# Altium PCB STM32_RF_USB.PcbDoc
Units mil, origin at the board's own origin, x right, y up, seen from the top; angles counter-clockwise.
Board outline 1815.06 x 740.04 mil, 4 copper layers (L1, L2, L3, L4), stack 61.581 mil thick; 35 components, 33 nets, 170 pads, 74 vias.
Unrouted connection lines stored in the file: 7.
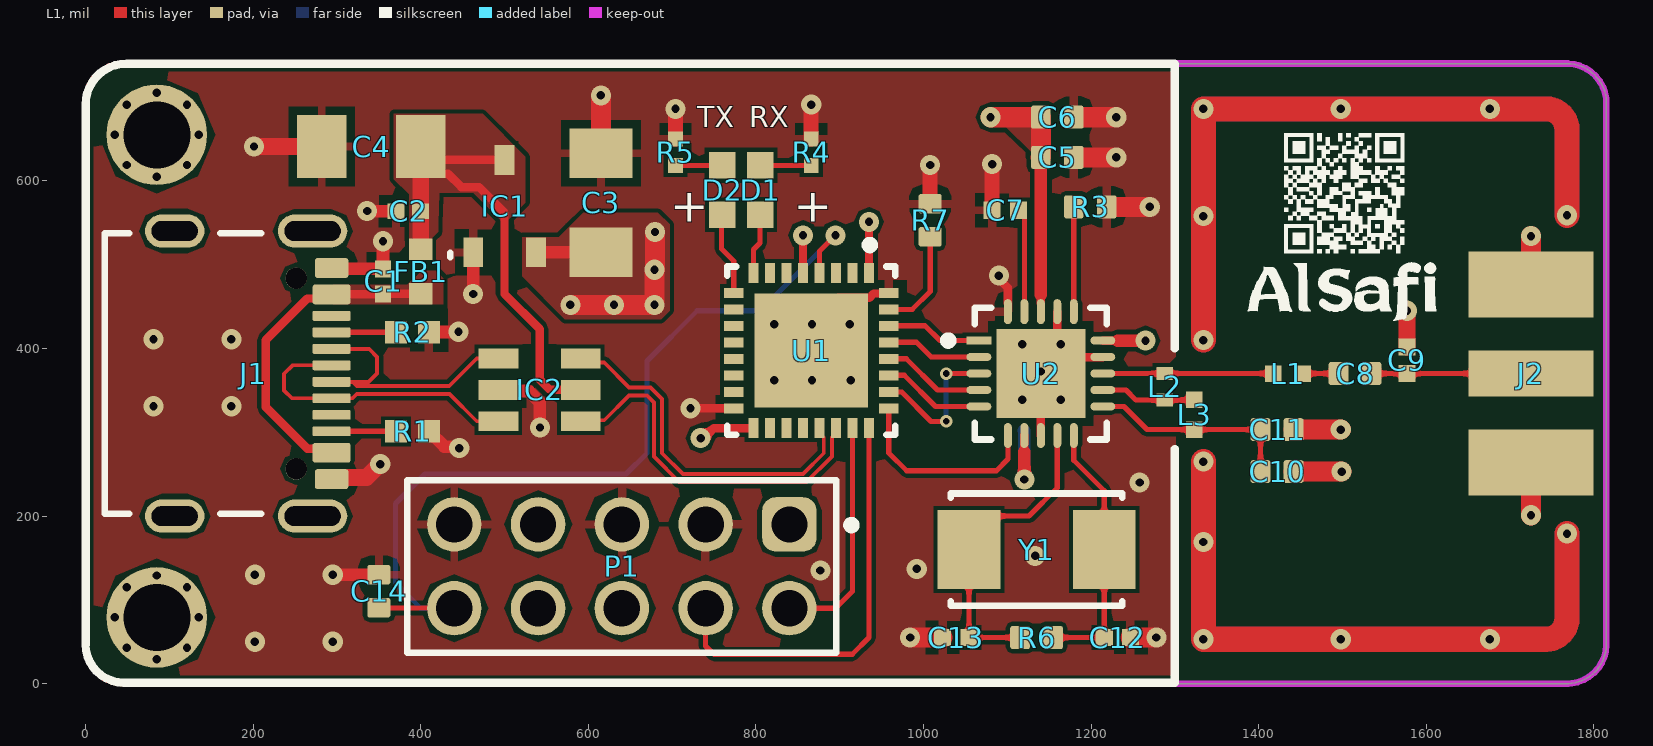
[diagram p0: L1 view]
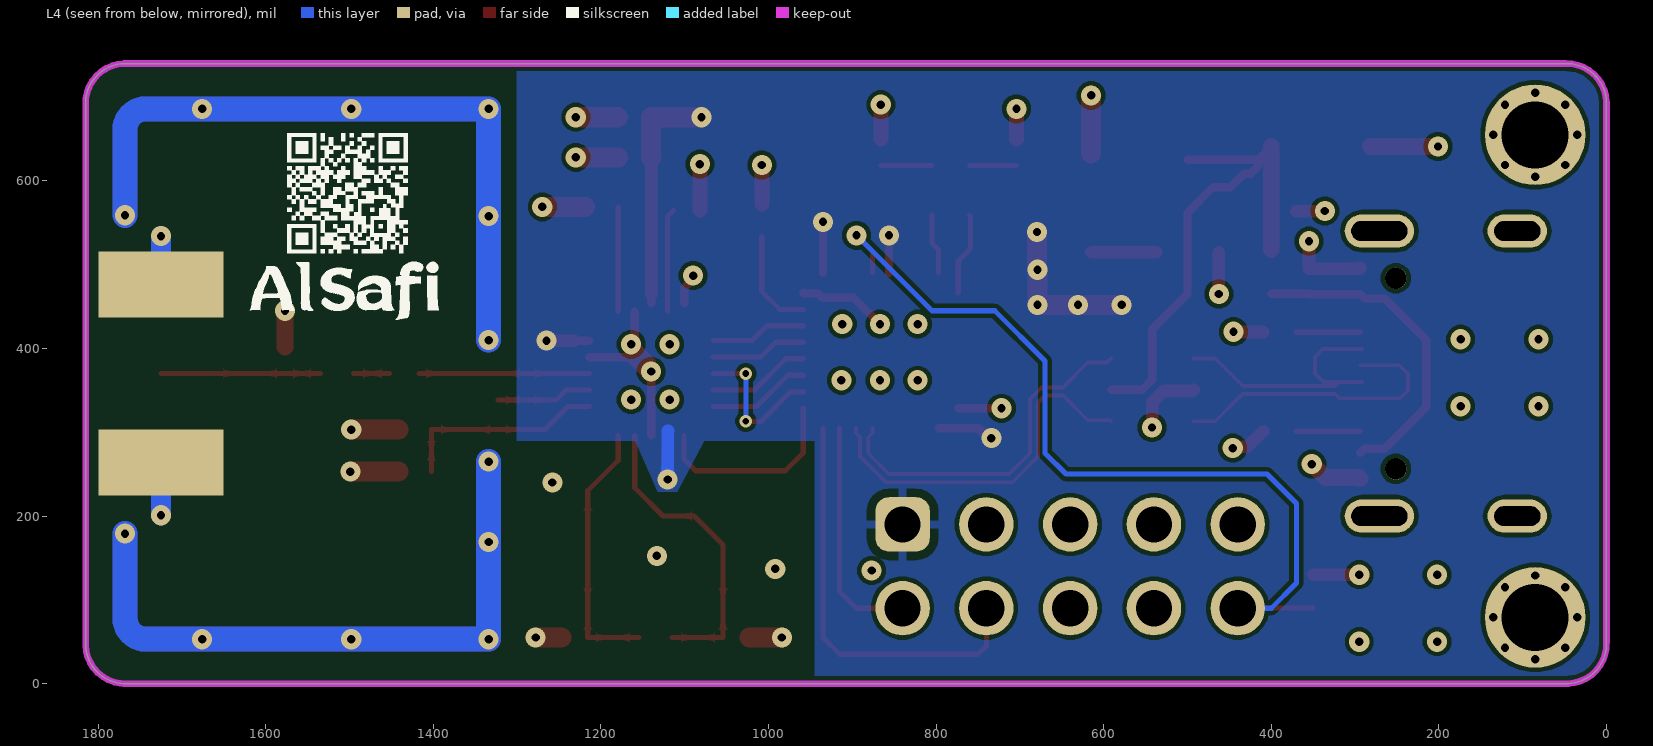
[diagram p1: L4 view, seen from below]
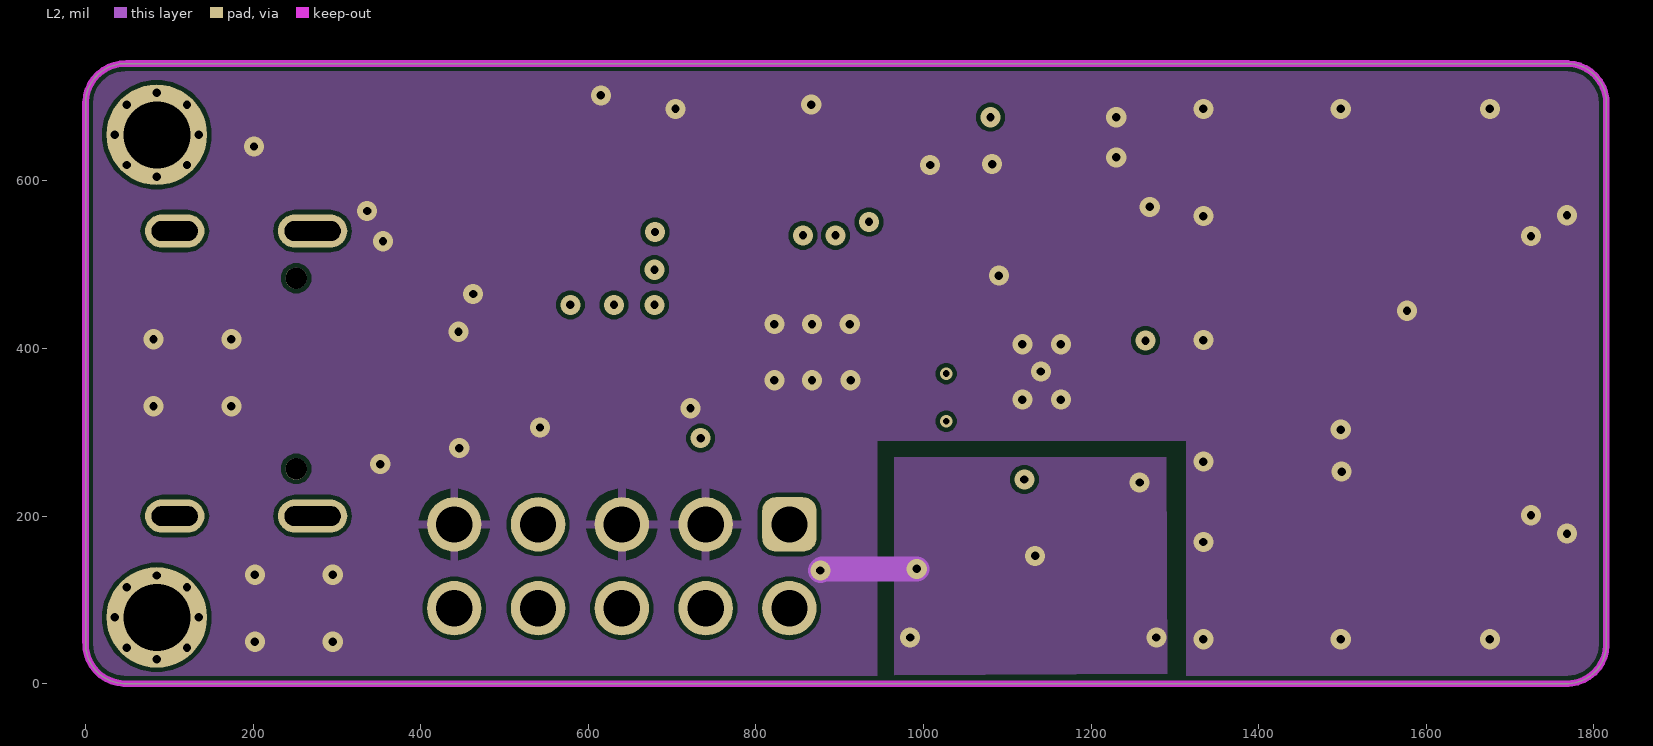
[diagram p2: L2]
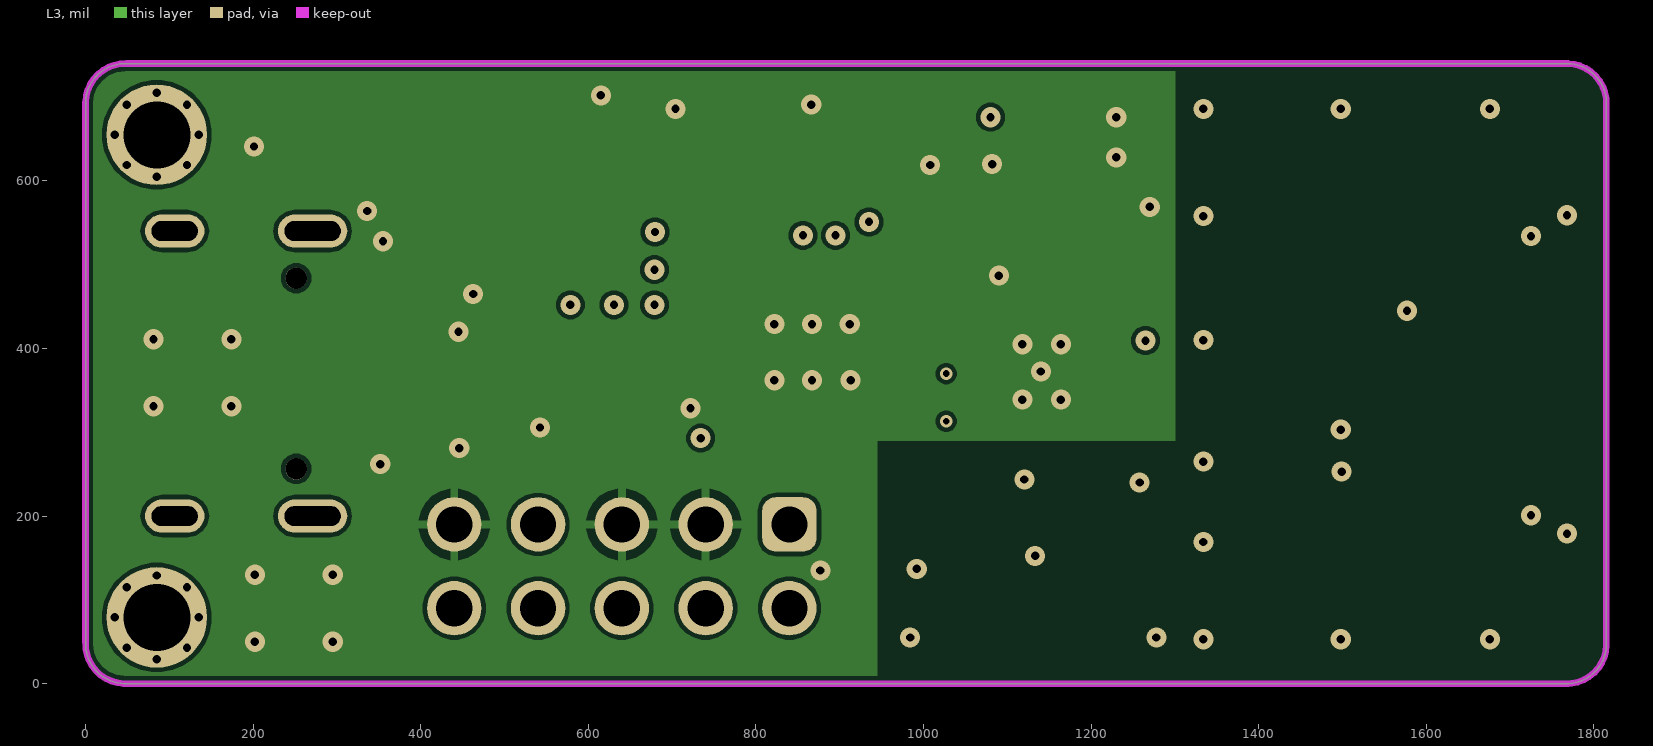
[diagram p3: L3]
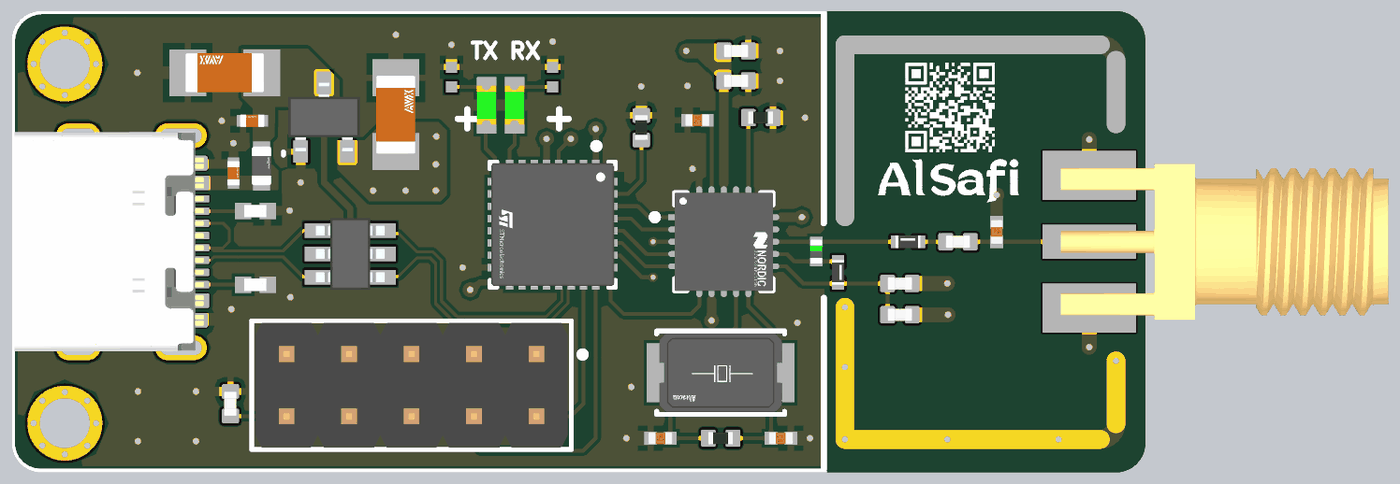
[diagram p4: 3D render of the assembled board from above, using the file's embedded part models]

## Layer stack, top to bottom
Top Solder: solder mask 1.2, Solder Resist, Dk 3.5
L1: signal copper 1.378
Dielectric 2: prepreg 3.913, PP-006, Dk 4.1
L2: signal copper 0.598
Dielectric 1: dielectric 49.803, FR-4, Dk 4.8
L3: signal copper 0.598
Dielectric 3: prepreg 3.913, PP-006, Dk 4.1
L4: signal copper 1.378
Bottom Solder: solder mask 1.2, Solder Resist, Dk 3.5

## Board outline
45.85,0 cw(c47.42,47.42) 0,48.99 0,694.15 cw(c47.42,692.58) 48.99,740 1769.18,740 cw(c1767.62,692.58) 1815.04,691.01 1815,691.01 1815,45.82 1815.06,45.82 cw(c1767.64,47.38) 1766.08,-0.04 1769.18,0

## Design rules (kind name [scope] priority, off if disabled: settings)
Clearance [All] p1: gap=5 ignorepadtopadclearanceinfootprint=FALSE
DiffPairsRouting DiffPairsRouting_DATA_OUT [InDifferentialPair('DATA_OUT')] p1: maxlimit=10 minlimit=5 mostfreqgap=10 toplayer_maxgap=5 toplayer_prefgap=5 toplayer_minwidth=4.63 toplayer_maxwidth=4.63 toplayer_prefwidth=4.63 bottomlayer_maxgap=5 bottomlayer_prefgap=5 bottomlayer_minwidth=4.63 bottomlayer_maxwidth=4.63 bottomlayer_prefwidth=4.63 impedanceprofiledriven=TRUE impedanceprofileid={FFCE39F3-9175-4516-A058-230652CB62AE} impedanceprofilevalue=90.000000 maxuncoupledlength=500
DiffPairsRouting DiffPairsRouting_DATA_IN [InDifferentialPair('DATA_IN')] p2: maxlimit=10 minlimit=5 mostfreqgap=10 toplayer_maxgap=5 toplayer_prefgap=5 toplayer_minwidth=4.63 toplayer_maxwidth=4.63 toplayer_prefwidth=4.63 bottomlayer_maxgap=5 bottomlayer_prefgap=5 bottomlayer_minwidth=4.63 bottomlayer_maxwidth=4.63 bottomlayer_prefwidth=4.63 impedanceprofiledriven=TRUE impedanceprofileid={FFCE39F3-9175-4516-A058-230652CB62AE} impedanceprofilevalue=90.000000 maxuncoupledlength=1000
HoleToHoleClearance [All] p1: gap=5 allowstackedmicrovias=TRUE
MinimumSolderMaskSliver [All] p1: minsoldermaskwidth=3.5
PolygonConnect [All] p1: thpad.connectstyle=Relief thpad.reliefconductorwidth=10 thpad.reliefentries=4 thpad.polygonreliefangle="90 Angle" thpad.airgapwidth=10 smdpad.connectstyle=Relief smdpad.reliefconductorwidth=10 smdpad.reliefentries=4 smdpad.polygonreliefangle="90 Angle" smdpad.airgapwidth=10 via.connectstyle=Direct via.reliefconductorwidth=10 via.reliefentries=4 via.polygonreliefangle="90 Angle" via.airgapwidth=10
RoutingVias Big_Scrow_Via [InNet('No Net')] p1: holewidth=28 width=28 viastyle="Through Hole" minholewidth=0 minwidth=0 maxholewidth=200 maxwidth=200
RoutingVias RoutingVias_1 [InNet('SPI_SCK')] p2: holewidth=5 width=10 viastyle="Through Hole" minholewidth=5 minwidth=6 maxholewidth=5 maxwidth=10
RoutingVias [All] p3: holewidth=10 width=24.02 viastyle="Through Hole" minholewidth=10 minwidth=24 maxholewidth=200 maxwidth=200
SolderMaskExpansion [All] p1: expansion=4 istentingtop=FALSE
Width Power_5V0 [InNet('5V0')] p1: maxlimit=100 minlimit=10 preferedwidth=24
Width Power_VBUS [InNet('VBUS')] p2: maxlimit=100 minlimit=10 preferedwidth=24
Width Power_3V3 [InNet('3V3')] p3: maxlimit=100 minlimit=10 preferedwidth=24
Width Power_GND [InNet('GND')] p4: maxlimit=100 minlimit=10 preferedwidth=24 minimp=50.000000 maximp=50.000000 favimp=50.000000
Width [All] p5: maxlimit=100 minlimit=6.17 preferedwidth=10 toplayer_maxwidth=6.17 toplayer_prefwidth=6.17 bottomlayer_maxwidth=6.17 bottomlayer_prefwidth=6.17 impedanceprofiledriven=TRUE impedanceprofileid={D1DDD18D-069C-498E-9F1E-06DCECEB124C} impedanceprofilevalue=50.000000 minimp=50.000000 maximp=50.000000 favimp=50.000000
27 further rules are at their usual default settings.

## Classes and differential pairs
component class USB_Power_3V3_Regulator: C1 C2 C3 C4 FB1 IC1 IC2 R1 R2
component class "STM32_ nRF24GHz": C5 C6 C7 C8 C9 C10 C11 C12 C13 C14 D1 D2 J2 L1 L2 L3 P1 R3 R4 R5 R6 R7 U1 U2 Y1
differential pair DATA_OUT: +DATA_OUT_P -DATA_OUT_N
differential pair DATA_IN: +DATA_IN_P -DATA_IN_N

## Components (designator, comment, footprint, x,y, rotation, side; value= is the part's Value field where it differs from the comment)
C1 "CL05A104KP5NNNC" FP-CL46-IPC_C 355,480 r90 top
C2 "CL05A104KP5NNNC" FP-CL46-IPC_C 385.1,564 r180 top
C3 "1206ZD106KAT2A" FP-1206-L_3_2_0_2-W_1_6_0-IPC_A 615,573.85 r90 top
C4 "1206ZD106KAT2A" FP-1206-L_3_2_0_2-W_1_6_0-IPC_A 340.91,641 r180 top
C5 "C0402" CAP_0402 1159.75,628 r180 top
C6 "C0402" CAP_0402 1159.75,676 r180 top
C7 "C0402C333K4RACTU" FP-C0402-BB-MFG 1097.63,565 r180 top value=33nF
C8 "C0402" CAP_0402 1515,370.05 r0 top
C9 "C0402C109C5GACTU" FP-C0402-BB-MFG 1577,385.8 r90 top value="1.0 pF"
C10 "C0402" CAP_0402 1421.97,253 r180 top
C11 "C0402" CAP_0402 1421.97,303.12 r180 top
C12 "C0402C270J5GACTU" FP-C0402-BB-MFG 1231.46,55 r0 top value="27 pF"
C13 "C0402C270J5GACTU" FP-C0402-BB-MFG 1038.54,55 r180 top value="27 pF"
C14 "C0402" CAP_0402 350,110.32 r270 top
D1 "LTST-C190GKT" FP-LTST-C190GKT-MFG 805,589 r270 top locked
D2 "LTST-C190GKT" FP-LTST-C190GKT-MFG 760,589 r270 top
FB1 "BLM18EG101TN1D" FP-BLM18-0_15-t0_5-MFG 400,491.67 r90 top
IC1 "XC6206P332MR" SOT95P280X130-3N 500,569.88 r90 top
IC2 "USBLC6-2SC6" SOT95P280X145-6N 542,350.55 r0 top
J1 "USB4105-GF-A-060" USB4105-GF-A-060 200,370.05 r270 top locked
J2 "CON-SMA-EDGE-S" CON-SMA-EDGE-S 1725,370.05 r0 top
L1 "744901082" WE-TCI_0402 1435,370.05 r0 top
L2 "LQG15HN8N2J02D" FP-LQG15HH_02-MFG 1288,354.3 r90 top
L3 "744901027" WE-TCI_0402 1323,320.84 r270 top
P1 "61301021121" 61301021121 640,140 r180 top
R1 "CRCW04025K10FKED" FP-CRCW0402-e3-IPC_A 390,301.15 r180 top
R2 "CRCW04025K10FKED" FP-CRCW0402-e3-IPC_A 390,419.26 r180 top
R3 "22K" RES_0402 1199.12,569 r180 top
R4 "CRCW040242K2FKED" RESC1005X40X25LL05T05 866,634.28 r270 top
R5 "CRCW040242K2FKED" RESC1005X40X25LL05T05 704,634.28 r270 top
R6 "1MOhm" RES_0402 1135,55 r0 top
R7 "10k" RES_0402 1008,553 r90 top
U1 "STM32L432KBU6" FP-UFQFPN32-A0B8-MFG 866.1,397.48 r270 top
U2 "NRF24L01" FP-NRF24L01-IPC_C 1140.06,370.05 r0 top
Y1 "ABM3-16.000MHZ-D2Y-T" FP-ABM3-MFG 1135,160 r180 top

## Footprints (in the part's own frame and the unit in brackets; to place one, negate y for a bottom-side part, rotate by r counter-clockwise, add the part's x,y. Pads: shape width x height; smd on the part's side, far side on the other; paste and mask are expansions set on the pad)
61301021121 [mm] "Pin Header, pitch 2.54 mm, THT, Vertical, dual row, 10p"
  rrect50% 1.65x1.65 hole 1.1: 1(-5.08,-1.27)
  round 1.65 hole 1.1: 2(-5.08,1.27) 3(-2.54,-1.27) 4(-2.54,1.27) 5(0,-1.27) 6(0,1.27) 7(2.54,-1.27) 8(2.54,1.27) 9(5.08,-1.27) 10(5.08,1.27)
  silkscreen extent -7.08,-2.62 6.5,2.62, body extent -6.35,-2.54 6.35,2.54, height 8.59
CAP_0402 [mm]
  rrect25% 0.6x0.7 smd: 1(-0.5,0) 2(0.5,0)
  body extent -0.5,-0.26 0.5,0.26, height 0.37
CON-SMA-EDGE-S [mm]
  rect 3.8x1.4 smd mask+0.07: 1(0,0)
  rect 3.8x2 smd mask+0.07: 2(0,-2.7) 2(0,2.7)
  rect 3.8x2 smd far side mask+0.07: 2(0,-2.7) 2(0,2.7)
  body extent -1.16,-3.17 12.17,3.17, height 3.64
FP-1206-L_3_2_0_2-W_1_6_0-IPC_A [mil]
  rect 59.24x75.05 smd paste+0 mask+0: 1(-59.09,0) 2(59.09,0)
  body extent -108,-57 108,57, height 10
FP-ABM3-MFG [mm]
  rect 1.9x2.4 smd paste+0 mask+0: 1(-2.05,0) 2(2.05,0)
  silkscreen extent -2.6,-1.7 2.6,1.7, body extent -3.1,-1.8 3.1,1.8, height 0.25
FP-BLM18-0_15-t0_5-MFG [mm]
  rect 0.65x0.7 smd paste+0 mask+0: 1(-0.675,0) 2(0.675,0)
  body extent -1.1,-0.58 1.1,0.58, height 0.25
FP-C0402-BB-MFG [mm]
  rect 0.52x0.52 smd paste+0 mask+0: 1(-0.4,0) 2(0.4,0)
  body extent -0.8,-0.4 0.8,0.4, height 0.25
FP-CL46-IPC_C [mil]
  rect 20.29x18.6 smd paste+0 mask+0: 1(-14.9,0) 2(14.9,0)
  body extent -29,-15 29,15, height 10
FP-CRCW0402-e3-IPC_A [mil]
  rect 26.31x26.48 smd paste+0 mask+0: 1(-19.77,0) 2(19.77,0)
  body extent -41,-21 41,21, height 10
FP-LQG15HH_02-MFG [mm]
  rect 0.4x0.5 smd paste+0 mask+0: 1(-0.4,0) 2(0.4,0)
  body extent -0.7,-0.38 0.7,0.38, height 0.25
FP-LTST-C190GKT-MFG [mm]
  rect 0.8x0.8 smd paste+0 mask+0: 1(-0.75,0) 2(0.75,0)
  body extent -1.25,-0.55 1.25,0.55, height 0.25
FP-NRF24L01-IPC_C [mm]
  rect 0.756x0.239 smd paste+0 mask+0: 1(-1.878,1)
  rrect100% 0.756x0.239 smd paste+0 mask+0: 2(-1.878,0.5) 3(-1.878,0) 4(-1.878,-0.5) 5(-1.878,-1) 11(1.878,-1) 12(1.878,-0.5) 13(1.878,0) 14(1.878,0.5) 15(1.878,1)
  rrect100% 0.239x0.756 smd paste+0 mask+0: 6(-1,-1.878) 7(-0.5,-1.878) 8(0,-1.878) 9(0.5,-1.878) 10(1,-1.878) 16(1,1.878) 17(0.5,1.878) 18(0,1.878) 19(-0.5,1.878) 20(-1,1.878)
  rect 2.7x2.7 smd paste-1000 mask+0: 21(0,0)
  silkscreen extent -2.93,-2 2,2, body extent -2.36,-2.36 2.36,2.36, height 0.25
FP-UFQFPN32-A0B8-MFG [mm]
  rect 0.6x0.3 smd paste+0 mask+0: 1(-2.35,1.75) 2(-2.35,1.25) 3(-2.35,0.75) 4(-2.35,0.25) 5(-2.35,-0.25) 6(-2.35,-0.75) 7(-2.35,-1.25) 8(-2.35,-1.75) 17(2.35,-1.75) 18(2.35,-1.25) 19(2.35,-0.75) 20(2.35,-0.25) 21(2.35,0.25) 22(2.35,0.75) 23(2.35,1.25) 24(2.35,1.75)
  rect 0.3x0.6 smd paste+0 mask+0: 9(-1.75,-2.35) 10(-1.25,-2.35) 11(-0.75,-2.35) 12(-0.25,-2.35) 13(0.25,-2.35) 14(0.75,-2.35) 15(1.25,-2.35) 16(1.75,-2.35) 25(1.75,2.35) 26(1.25,2.35) 27(0.75,2.35) 28(0.25,2.35) 29(-0.25,2.35) 30(-0.75,2.35) 31(-1.25,2.35) 32(-1.75,2.35)
  rect 3.45x3.45 smd paste+0 mask+0: 33(0,0)
  silkscreen extent -3.32,-2.55 2.55,2.55, body extent -2.75,-2.75 2.75,2.75, height 0.25
RES_0402 [mm]
  rrect25% 0.6x0.7 smd: 1(-0.5,0) 2(0.5,0)
  body extent -0.5,-0.25 0.5,0.25, height 0.3
RESC1005X40X25LL05T05 [mm] "Chip Resistor, 2-Leads, Body 1.00x0.50mm, IPC High Density"
  rect 0.45x0.45 smd: 1(-0.4,0) 2(0.4,0)
  body extent -0.53,-0.27 0.53,0.28, height 0.4
SOT95P280X130-3N [mm]
  rect 0.9x0.6 smd: 1(-1.4,0.95) 2(-1.4,-0.95) 3(1.4,0)
  silkscreen extent -1.55,1.65 -1.42,1.65, body extent -1.4,-1.45 1.4,1.45, height 1.3
SOT95P280X145-6N [mm]
  rect 1.2x0.6 smd: 1(-1.25,0.95) 2(-1.25,0) 3(-1.25,-0.95) 4(1.25,-0.95) 5(1.25,0) 6(1.25,0.95)
  body extent -1.4,-1.46 1.4,1.46, height 1.45
USB4105-GF-A-060 [mm]
  rrect25% 0.6x1.016 smd mask+0.05: A1B12(-3.2,2.378) B1A12(3.2,2.378)
  rrect25% 0.6x1.15 smd mask+0.05: A4B9(-2.4,2.378) B4A9(2.4,2.378)
  rrect25% 0.3x1.15 smd mask+0.05: A5(-1.25,2.378) A6(-0.25,2.378) A7(0.25,2.378) A8(1.25,2.378) B5(1.75,2.378) B6(0.75,2.378) B7(-0.75,2.378) B8(-1.75,2.378)
  round 0.65 hole 0.65 unplated paste+0 mask+0.05: MH(-2.89,1.303) MH(2.89,1.303)
  oval 1x2.1 hole 0.6 slot 1.7 at 90 deg: SH(-4.32,1.803) SH(4.32,1.803)
  oval 1x1.8 hole 0.6 slot 1.4 at 90 deg: SH(-4.32,-2.377) SH(4.32,-2.377)
  silkscreen extent -4.25,-4.5 4.25,0.25, body extent -4.47,-4.97 4.47,2.73, height 3.27
WE-TCI_0402 [mm] "Thinfilm Chip Inductor, 2-leads, body 1.00x0.50mm"
  rect 0.5x0.5 smd: 1(-0.45,0) 2(0.45,0)
  body extent -0.5,-0.25 0.5,0.25, height 0.32

## Part data
C1 C2: library part CMP-13271-002143-1, "Cap Ceramic 100nF 10V X5R ±10% SMD 0402 +85°C Paper T/R", Capacitance=100nF, Case Code (Imperial)=0402, Case Code (Metric)=1005, Dielectric=X5R, Max Operating Temperature=85°C, Min Operating Temperature=-55°C, Tolerance=10%, Voltage Rating=10V, Case/Package=0402, Contact Plating=Tin, Depth=0.5mm, Height=0.5mm, Length=1mm, Mount="Surface Mount", Packaging="Tape and Reel", Radiation Hardening=No, Thickness=0.022inch, Width=0.02inch
C3 C4: library part CMP-04427-021870-1, "General Purpose Ceramic Capacitor, 1206, 10uF, 10%, X5R, 15%, 10V", Capacitance=10uF, Case Code (Imperial)=1206, Case Code (Metric)=3216, Dielectric=X5R, Max Operating Temperature=85°C, Min Operating Temperature=-55°C, Package Quantity=1, Tolerance=10%, Voltage=10V, Case/Package=1206, Construction=Flat, Contact Plating=Tin, Depth=1.6mm, Height=0.07mm, Lead Free="Lead Free", Length=3.2mm, Mount="Surface Mount", Number of Pins=2, Packaging="Tape and Reel", Radiation Hardening=No, REACH SVHC="No SVHC", RoHS Compliant=Yes, Series=-, Size=1.78mm, Termination=SMD/SMT, Thickness=0.07inch, Voltage Rating=10V, Voltage Rating (DC)=10V, Width=0.063inch
C5 C6 C8 C10 C11 C14: library part CAP_0402, "Capacitor SMD 0402"
  C5: Parameter 1=10nF
  C6: Parameter 1=1nF
  C8: Parameter 1=1.5pF
  C10 C14: Parameter 1=2.2nF
  C11: Parameter 1=4.7pF
C7: library part CMP-2008-03182-2, "0402 C 33nF Ceramic Multilayer Capacitor; 16 V; +125degC; X7R Dielectric; +/-10%", Capacitance=33nF, Manufacturer=Kemet, Package=C0402-BB, Temperature="-55°C to +125°C", Temperature Characteristic=X7R, Temperature Coefficient=15%, Temperature Range High=+125°C, Temperature Range Low=-55°C, Tolerance=0.1, Voltage Rating="16 V", Automotive=No, Category=Cap, ComponentLink2Description=Datasheet, ComponentLink2URL=https://content.kemet.com/datasheets/KEM_C1002_X7R_SMD.pdf, Device Class L1="Passive Components", Device Class L2=Capacitors, Device Class L3="Ceramic Capacitors", Digikey Description="0402 C 33nF Ceramic Multilayer Capacitor; 16 V; +125degC; X7R Dielectric; +/-10%", Height=0.55mm, Ipc Land Pattern Name=CAPC10050X50, Lead Free=Yes, Manufacturer Part Number=C0402C333K4RACTU, Material=Ceramic, Mouser Description="0402 C 33nF Ceramic Multilayer Capacitor; 16 V; +125degC; X7R Dielectric; +/-10%", Octopart=https://octopart.com/c0402c333k4ractu-kemet-128815, RoHS=TRUE
C9: library part CMP-2008-03470-3, "CAP CER 1PF 50V NP0 0402", Capacitance="1.0 pF", Manufacturer=Kemet, Package=C0402-BB, Temperature="-55°C to +125°C", Temperature Characteristic=C0G, Temperature Coefficient=15%, Temperature Range High=+125°C, Temperature Range Low=-55°C, Tolerance="0.25 pF", Voltage Rating="50 V", Automotive=No, Category=Cap, ComponentLink2Description=Datasheet, ComponentLink2URL=https://content.kemet.com/datasheets/KEM_C1002_X7R_SMD.pdf, Device Class L1="Passive Components", Device Class L2=Capacitors, Device Class L3="Ceramic Capacitors", Digikey Description="CAP CER 1PF 50V NP0 0402", Height=0.55mm, Ipc Land Pattern Name=CAPC10050X50, Lead Free=Yes, Manufacturer Part Number=C0402C109C5GACTU, Material=Ceramic, Mouser Description="Multilayer Ceramic Capacitors MLCC - SMD/SMT 50volts 1.0pF C0G .25pF", Octopart=https://octopart.com/c0402c109c5gactu-kemet-9138550, RoHS=TRUE
C12 C13: library part CMP-1034-00963-6, "CAP CER 27PF 50V C0G/NP0 0402", Capacitance="27 pF", Manufacturer=Kemet, Package=C0402-BB, Temperature="-55°C to +125°C", Temperature Characteristic=C0G, Temperature Coefficient=15%, Temperature Range High=+125°C, Temperature Range Low=-55°C, Tolerance=0.05, Voltage Rating="50 V", Automotive=No, Category=Cap, ComponentLink2Description=Datasheet, ComponentLink2URL=https://content.kemet.com/datasheets/KEM_C1002_X7R_SMD.pdf, Device Class L1="Passive Components", Device Class L2=Capacitors, Device Class L3="Ceramic Capacitors", Digikey Description="CAP CER 27PF 50V C0G/NP0 0402", Height=0.55mm, Ipc Land Pattern Name=CAPC10050X50, Lead Free=Yes, Manufacturer Part Number=C0402C270J5GACTU, Material=Ceramic, Mouser Description="Multilayer Ceramic Capacitor, C Series, 27 pF, - 5%, C0G / NP0, 50 V, 0402 [1005 Metric]", Octopart=https://octopart.com/c0402c270j5gactu-kemet-149444, RoHS=TRUE
D1 D2: library part CMP-22017-000005-2, "LED GREEN CLEAR CHIP SMD", Case Code (Imperial)=0603, Case Code (Metric)=1608, Color=Green, Forward Current=30mA, Forward Voltage=2.1V, Lens Color=Colorless, Max Operating Temperature=85°C, Min Operating Temperature=-55°C, Package Quantity=1, Power Dissipation=100mW, Reverse Voltage=5V, Test Current=10mA, Voltage=2V, Case/Package=0603, Depth=0.8mm, Dominant Wavelength=569nm, Height=0.8mm, Illumination Color=Green, Lead Free="Lead Free", Length=1.6mm, Lens Style=Clear, Lens Transparency=Clear, Luminous Intensity=6mcd, Mount="Surface Mount", Number of Elements=1, Number of LEDs=1, Number of Pins=2, Packaging="Tape and Reel", Power Rating=100mW, Radiation Hardening=No, Viewing Angle=130°, Wavelength=565nm, Width=0.8mm
FB1: library part CMP-0686-00530-3, "Chip Ferrite Bead, 0603, 100Ω @ 100MHz, 25%, 0.045Ω, 2A", Case Code (Imperial)=0603, Case Code (Metric)=1608, Current Rating=2A, DC Resistance (DCR)=45mR, Max Operating Temperature=125°C, Min Operating Temperature=-55°C, Package Quantity=1, Test Frequency=100MHz, Tolerance=25%, Case/Package=0603, Contact Plating=Tin, Core Material=Ferrite, Depth=0.8mm, Height=0.8mm, Impedance=100R, Lead Free="Lead Free", Length=1.6mm, Material=Ferrite, Max Current Rating=2A, Max DC Current=2A, Number Of Circuits=1, Number of Lines=1, Number of Pins=2, Packaging="Tape and Reel", REACH SVHC="No SVHC", Termination=SMD/SMT, Width=0.8mm
IC1: "Integrated Circuit", Manufacturer_Name=Torex, Mouser Part Number=N/A, Datasheet Link=http://www.torexsemi.com/products/voltage_regulators/data/XC6206.pdf, Height=1.3mm, Manufacturer_Part_Number=XC6206P332MR, Mouser Price/Stock=https://www.mouser.co.uk/ProductDetail/Torex-Semiconductor/XC6206P332MR?qs=TiOZkKH1s2Qxu69VLzzkSQ%3D%3D
IC2: "Integrated Circuit", Manufacturer_Name=STMicroelectronics, Mouser Part Number=511-USBLC6-2SC6, Arrow Part Number=USBLC6-2SC6, Arrow Price/Stock=https://www.arrow.com/en/products/usblc6-2sc6/stmicroelectronics?utm_currency=USD&region=europe, Datasheet Link=http://www.st.com/st-web-ui/static/active/en/resource/technical/document/datasheet/CD00050750.pdf, Height=1.45mm, Manufacturer_Part_Number=USBLC6-2SC6, Mouser Price/Stock=https://www.mouser.co.uk/ProductDetail/STMicroelectronics/USBLC6-2SC6?qs=po45yt2pPpu%2FhNIlwQdTlg%3D%3D
J1: "USB Connector Type C SMT 12 Pin", Manufacturer=GCT, Distributor Link=https://eu.mouser.com/ProductDetail/GCT/USB4105-GF-A-060?qs=QNEnbhJQKvY2mocwNJzgfA%3D%3D, Manufacturer Part Number=USB4105-GF-A-060
J2: "RF Connector SMA Female 50 Ohms 18 GHz PCB Edge Mount", Manufacturer="RF Solutions", Manufacturer Part Number=CON-SMA-EDGE-S
L1: library part CMP-03913-14415882-1, "744901082 Fixed Ind 8.2NH 220MA 1.1 Ohm SMD", Case Code (Imperial)=0402, Case Code (Metric)=1005, Current Rating=220mA, DC Resistance (DCR)=540mΩ, Inductance=8.2nH, Max Operating Temperature=125°C, Min Operating Temperature=-40°C, Self Resonant Frequency=5.5GHz, Test Frequency=500MHz, Tolerance=2%, Case/Package=0402, Composition="Thin Film", Height=320µm, Height - Seated (Max)=406.4µm, Length=1mm, Max DC Current=220mA, Mount="Surface Mount", NexarPartId=14415882, Number of Pins=2, Packaging=Digi-Reel®, Q Factor=13, REACH SVHC=Unknown, RoHS=Compliant, Shielding=Unshielded, Termination=SMD/SMT, Weight=652.039032µg, Width=500µm
L2: library part CMP-06042-008586-1, "Multilayer type RF Inductor 8.2nH ±5% 0.25Ω 500mA 0402", Case Code (Imperial)=0402, Case Code (Metric)=1005, Current Rating=300mA, DC Resistance (DCR)=330mR, Inductance=8.2nH, Inductance Tolerance=5%, Max Operating Temperature=125°C, Min Operating Temperature=-55°C, Package Quantity=1, Self Resonant Frequency=3.6GHz, Test Frequency=100MHz, Case/Package=0402, Core Material=Air, DC Current=300mA, Depth=0.55mm, Height=0.02inch, Height - Seated (Max)=0.022inch, Lead Free="Lead Free", Length=1mm, Max DC Current=300mA, Military Standard=Not, Mount="Surface Mount", Packaging="Tape and Reel", Q Factor=8, Radiation Hardening=No, REACH SVHC="No SVHC", Shielding=Unshielded, Termination=SMD/SMT, Tolerance=5%, Width=0.5mm
L3: library part CMP-03913-14415876-1, "744901027 Fixed Ind 2.7NH 440MA 300MOHM Sm", Case Code (Imperial)=0402, Case Code (Metric)=1005, Current Rating=440mA, DC Resistance (DCR)=270mΩ, Inductance=2.7nH, Max Operating Temperature=125°C, Min Operating Temperature=-40°C, Self Resonant Frequency=8GHz, Test Frequency=500MHz, Case/Package=0402, Composition="Thin Film", Core Material=Alumina, Height=320µm, Height - Seated (Max)=406.4µm, Length=1mm, Max DC Current=440mA, Mount="Surface Mount", NexarPartId=14415876, Number of Pins=2, Packaging="Tape & Reel (TR)", Q Factor=13, REACH SVHC=Unknown, RoHS=Compliant, Shielding=Unshielded, Termination=SMD/SMT, Weight=652.039032µg, Width=500µm
P1: library part CMP-1502-01084-3, Color=Black, Contact Resistance=20mΩ, Current Rating=3A, Flammability Rating="UL94 V-0", Insulation Resistance=1GΩ, Max Operating Temperature=105°C, Min Operating Temperature=-40°C, Operating Supply Voltage=250V, Connector Type="Male Pin", Contact Gender=Male, Contact Material=Copper, Contact Mating Length=5.9944mm, Contact Plating=Gold, Gender=Male, Height=2.54mm, Housing Material=PBT, Insulation=Insulated, Lead Pitch=2.54mm, Length=12.7mm, Mount="Through Hole", NexarPartId=18818163, Number of Contacts=10, Number of Pins=10, Number of Positions=10, Number of Rows=2, Orientation=Vertical, Packaging=Bulk, Pitch=2.54mm, REACH SVHC=Unknown, RoHS=Compliant, Row Spacing=2.54mm, Termination="Through Hole", Voltage Rating=250V, Width=12.7mm
R1 R2: library part CMP-1011-00590-4, "RES Thick Film, 5.1kΩ, 1%, 0.063W, 100ppm/°C, 0402", Case Code (Imperial)=0402, Case Code (Metric)=1005, Max Operating Temperature=155°C, Max Power Dissipation=63mW, Min Operating Temperature=-55°C, Package Quantity=10, Resistance=5.1kR, Temperature Coefficient=100ppm/°C, Tolerance=1%, Voltage Rating=50V, Case/Package=0402, Composition="Thick Film", Contact Plating=Tin, Depth=0.5mm, Features="Automotive AEC-Q200", Height=0.35mm, Lead Free="Lead Free", Length=1mm, Military Standard=Not, Number of Terminations=2, Packaging="Tape and Reel", Power Rating=63mW, Radiation Hardening=No, Termination=SMD/SMT, Voltage Rating (DC)=50V, Weight=2.3E-05oz, Width=0.02inch
R3 R6 R7: library part RES_0402, "Resistor SMD 0402"
  R7: Resistance=10k
R4 R5: library part CMP-2002-08626-1, Manufacturer="Vishay Dale", Parameter 1=2K2Ohm, Part Number=CRCW040242K2FKED
U1: library part CMP-12105-000014-1, "IC MCU 32BIT 128KB FLASH 32QFPN", Ambient Temperature Range High=+85°C, Ambient Temperature Range Low=-40°C, Frequency=80MHz, Manufacturer=STMicroelectronics, Max Junction Temp=+105°C, Max Supply Voltage=3.6V, Min Supply Voltage=1.62V, Package=UFQFPN32-A0B8, Temperature="-40°C to +85°C", Automotive=No, Category=IC, ComponentLink2Description=Datasheet, ComponentLink2URL=https://www.st.com/resource/en/datasheet/stm32l432kb.pdf, Core Architecture="ARM Cortex-M4", Data Bus Width=32bits, Device Class L1="Integrated Circuits (ICs)", Device Class L2="Embedded Processors and Controllers", Device Class L3=Microcontrollers, Digikey Description="IC MCU 32BIT 128KB FLASH 32QFPN", Height=0.6mm, Interface=I2C,SPI,UART,USART,USB,IrDA, Ipc Land Pattern Name=QFN50P500X500X55-32, Lead Free=Yes, Manufacturer Part Number=STM32L432KBU6, Memory Size=128KBytes, Memory Type=FLASH, Number Of A/D Converters=1, Number Of Adc Channels=10, Number Of Cores=1, Number Of I2C Channels=2, Number Of I/Os=26, Number Of Spi Channels=2, Number Of Timers/Counters=8, Number Of Uart Channels=1, Octopart=https://octopart.com/stm32l432kbu6-stmicroelectronics-74568735, Ram Size=64KBytes, RoHS=TRUE, Temperature Range High=+85°C, Temperature Range Low=-40°C
U2: library part CMP-228436-000003-1, "IC RF TXRX ISM>1GHZ 20VFQFN"
Y1: library part CMP-27762-004490-1, "Crystal 16MHz ±20ppm 18pF SMD-2 5mm x 3.2mm", Case/Package=SMD/SMT, ESR (Equivalent Series Resistance)=40R, Frequency=16MHz, Frequency Stability=30ppm, Frequency Tolerance=20ppm, Load Capacitance=18pF, Max Operating Temperature=85°C, Min Operating Temperature=-40°C, Operating Frequency="16 MHz", Package Quantity=1000, Resistor Type=Ceramic, Height=0.051inch, Lead Free="Lead Free", Length=0.197inch, Mount="Surface Mount", Number of Pins=2, Packaging="Tape and Reel", RoHS Compliant=Yes, Series=ABM3, Series Resistance=40R, Termination=SMD/SMT, Tolerance=20ppm, Width=0.126inch

## Free pads (board coordinates)
  round 120 hole 80: 2(85,79) 2(85,655)
  round 0 hole 10: 3(135,79) 3(135,655) 4(35,79) 4(35,655) 5(85,129) 5(85,705) 6(85,29) 6(85,605) 7(49,115) 7(49,691) 8(121,43) 8(121,619) 9(49,43) 9(49,619) 10(121,115) 10(121,691)

## Via types
v1: diameter 24, hole 10, L1 to L4, tented both sides, 51 vias
v2: diameter 24, hole 10, L1 to L4, 12 vias
v3: diameter 24, hole 10, L1 to L4, tented top, 5 vias
v4: diameter 24.02, hole 10, L1 to L4, tented both sides, 4 vias
v5: diameter 15, hole 8, L1 to L4, tented both sides, 2 vias

## Nets (pads, with @x,y where several pads share a name; then routed paths per layer and width w, separated by ;. In a path a pad name is that pad's centre, name@x,y a point inside that pad or via, vN(x,y) a via of type N, cw(c..) or ccw(c..) an arc to the next point about the centre after c; other vN are vias at no path point)
3V3: C3.1 C5.2 C6.2 IC1.2 P1.1 U1.1 U1.5 U1.17 U2.7 U2.15 U2.18 | length 884
  L1 w10: v1(734,293) 737.79,293 749.75,304.96 U1.17 ; U1.5 v1(856.26,535) ; U1.1 v1(935,551) ; 1120.41,276.64 U2.7 ; 1140.06,463.94 1140.12,463.88 U2.18@1140.12,453.87 ; U2.15 1232,409.42
  L1 w15: IC1.2 C3.1 ; v1(1120.41,243.64) 1120.41,276.64 ; 1140.06,463.94 C5.2 ; 1232,409.42 v1(1265,409.42)
  L1 w24: v1(578.6,452) v1(630.6,452) v1(679,452) v1(679,494) 679.6,494 v1(679.6,539) ; v1(1080,676) C6.2 1140.06,664.5 C5.2 C5.2@1140,627.94
  L4 w15: 1120,302 1120.41,301.59 v1(1120.41,243.64)
5V0: C2.1 C4.1 FB1.2 IC1.3 IC2.5 | length 630.9
  L1 w10: C4.1@400,625 C4.1@416,625 ; C4.1 C4.1@416,625 ; IC1.3 C4.1@416,625 ; IC2.5 554.45,350.55 542,363 542,423 500,465 500,562 469.52,592.48 448.52,592.48 432.52,608.48 424.62,608.48 416,617.1 C4.1@416,625
  L1 w20: FB1.2 400,553 400,625 C4.1
CC1: J1.A5 R2.2 | length 76.6
  L1 w6.17: J1.A5 R2.2
CC2: J1.B5 R1.2 | length 76.6
  L1 w6.17: J1.B5 R1.2
DATA_IN_N: IC2.1 J1.A7 J1.B7 | length 355.9
  L1 w4.63: J1.A7@291.4,360.11 337.89,360.11 348,370.22 348,390 338.52,399.48 J1.B7@291.4,399.48 ; J1.A7 318.55,360.21 323.58,355.18 434.08,355.18 466.85,387.95 IC2.1
DATA_IN_P: IC2.3 J1.A6 J1.B6 | length 355.8
  L1 w4.63: J1.A6 247.11,379.89 237,369.78 237,350 246.48,340.52 J1.B6 318.55,340.52 323.58,345.55 434.45,345.55 466.85,313.15 IC2.3
DATA_OUT_N: IC2.6 U1.21 | length 427.2
  L1 w4.63: IC2.6 595.89,383.27 619.07,383.27 648.71,353.63 673.99,353.63 688,339.62 688,275 713,250 856,250 880.97,274.97 880.97,294.03 875.94,299.06 U1.21
DATA_OUT_P: IC2.4 U1.22 | length 441.7
  L1 w4.63: IC2.4 592.42,314.35 619.07,314.35 648.71,344 670,344 678.37,335.63 678.37,271.01 709.01,240.37 859.99,240.37 890.6,270.99 890.6,294.03 895.63,299.06 U1.22
DVDD: C7.1 U2.19 | length 123.9
  L1 w6.17: C7.1 1120.38,558 U2.19
GND: C1.2 C2.2 C3.2 C4.2 C5.1 C6.1 C7.2 C9.2 C10.1 C11.1 C12.2 C13.2 C14.1 IC1.1 IC2.2 J1.A1B12 J1.B1A12 J2.2 P1.3 P1.5 P1.9 R1.1 R2.1 R3.1 R4.1 R5.1 R7.2 U1.16 U1.32 U1.33 U2.8 U2.14 U2.17 U2.20 U2.21 | length 5138.7
  L1 w10: v1(722,328.58) U1.16 ; v1(867,429) 898.39,460.39 935.39,460.39 940.54,465.54 957.78,465.54 U1.32 ; v1(1090,487) 1090,483.21 1100.4,472.81 U2.20@1100.4,453.87 ; U2.8 U2.21 v1(1140.06,372.56) 1140.06,385.06 U2.21@1159.75,404.75 ; U2.21@1159.75,389.73 U2.14 ; U2.17 U2.21@1159.75,404.75 ; U2.21@1160,405 U2.21@1159.75,404.75
  L1 w15: J1.B1A12 J1.B1A12@294.07,244.53 ; J1.A1B12 294.73,494.9 C1.2 v1(355,528) ; v1(295,130) C14.1 ; v1(336,564) C2.2 ; R1.1 409.77,301.07 428.11,282.72 444.28,282.72 v1(446,281) ; R2.1 410.14,419.63 444.63,419.63 v4(445,420) ; v1(462.6,465) IC1.1 ; IC2.2 494.08,349.25 528.75,349.25 542.28,335.73 v4(542.28,305.72)
  L1 w18: R5.1 v1(704,686) ; R4.1 v1(866,691) ; R7.2 v1(1008,619) ; C7.2 v1(1081.88,620)
  L1 w20: v1(201,641) C4.2 ; J1.B1A12@294.07,244.53 295.41,245.88 335.48,245.88 v4(351.62,262.01) ; U2.21 U2.21@1159.75,389.73 ; C9.2 v3(1577,445)
  L1 w24: C3.2 v1(615,702) ; v1(984,55) C13.2 ; C5.1 v1(1230,628) ; C6.1 v1(1230,676) ; R3.1 v1(1270,569) ; C12.2 v1(1278,55) ; C10.1 v3(1499,253) ; C11.1 v3(1498,303.12) ; v3(1725,201) J2.2@1725,263.75 ; J2.2@1725,476.35 v3(1725,534)
  L1 w30: v2(1334,265) v2(1334,169) v2(1334,53) v2(1498,53) v2(1676,53) 1743,53 ccw(c1743,78) 1768,78 v2(1768,179) ; v2(1334,410) v2(1334,558) v2(1334,686) v2(1498,686) v2(1676,686) 1743,686 cw(c1743,661) 1768,661 v2(1768,559)
  L2 w30: v1(877,135) 879,137 v1(992,137)
  L4 w24: v3(1725,201) J2.2@1725,263.75 ; J2.2@1725,476.35 v3(1725,534)
  L4 w30: v2@1334.01,265.1 1334.01,53.1 1743.01,53.1 ccw(c1743.01,78.1) 1768.01,78.1 v2@1768.01,179.1 ; v2@1334.1,410 1334.1,686 v2(1498,686) v2(1676,686) 1743.1,686 cw(c1743.1,661) 1768.1,661 v2@1768.1,559
  other v1: 202,50 295,50 202,130 1133.17,152.43 1258,240 81,331 174,331 1118,339 1164,339 822,362 867,362 913,362 1118,405 1164,405 81,411 174,411 822,429 912,429
IREF: R3.2 U2.16 | length 125
  L1 w6.17: U2.16 R3.2
LED1: D1.2 U1.8 | length 72.7
  L1 w6.17: U1.8 797.2,518.2 805,526 D1.2
LED2: D2.2 U1.9 | length 99.5
  L1 w6.17: D2.2 759,558.47 759,519 773.58,504.42 U1.9
NetC8_1: C8.1 L1.2 | length 42.6
  L1 w6.17: L1.2 C8.1
NetD1_1: D1.1 R4.2 | length 61
  L1 w6.17: D1.1 R4.2
NetD2_1: D2.1 R5.2 | length 56
  L1 w6.17: R5.2 D2.1
NRF_ANT1: L2.1 L3.1 U2.12 | length 113.9
  L1 w6.17: U2.12 1241.64,350.36 1253.45,338.55 L2.1 L3.1
NRF_ANT2: L1.1 L2.2 U2.13 | length 273.3
  L1 w6.17: U2.13 L2.2 ; U2.13@1218,370.05 L1.1
NRF_CE: U1.30 U2.1 | length 114.8
  L1 w6.17: U1.30 1001.99,427.01 1019.58,409.42 U2.1
NRF_IRQ: U1.25 U2.6 | length 238.5
  L1 w6.17: U1.25 958.62,275.38 980,254 1087,254 1101,268 1101,295.8 U2.6
NRF_VDD_PA: C10.2 C11.2 L3.2 U2.11 | length 249.8
  L1 w6.17: U2.11 1239.32,330.68 1266.88,303.12 L3.2 C11.2 C10.2
NRF_XC1: C12.1 R6.2 U2.10 Y1.1 | length 317.2
  L1 w6.17: R6.2 C12.1 Y1.1 1215.71,230.29 1179.43,266.57 U2.10
NRF_XC2: C13.1 R6.1 U2.9 Y1.2 | length 367.7
  L1 w6.17: R6.1 C13.1 Y1.2 1054.29,165.68 1088.61,200 1126,200 1159.75,233.75 U2.9
NRST: C14.2 P1.10 U1.4 | length 1042.6
  L1 w6.17: C14.2 350.31,90.32 439.68,90.32 P1.10 ; U1.4 875.94,515.94 v4(895,535)
  L4 w6.17: P1.10 400,90 370,120 370,215 405,250 645,250 670,275 670,385 730,445 805,445 v4(895,535)
PH3: R7.1 U1.31 | length 123.5
  L1 w6.17: U1.31 986.69,446.69 1008,468 R7.1
SMA: C8.2 C9.1 J2.1 | length 190.3
  L1 w6.17: C8.2 C9.1 J2.1
SPI_CS: U1.29 U2.2 | length 114.8
  L1 w6.17: U1.29 991.68,407.32 1009.27,389.73 U2.2
SPI_MIOS: U1.27 U2.5 | length 123
  L1 w6.17: U1.27 958.67,368 977,368 1014.32,330.68 U2.5
SPI_MOSI: U1.28 U2.4 | length 122.9
  L1 w6.17: U1.28 979.36,387.64 1016.64,350.36 U2.4
SPI_SCK: U1.26 U2.3 | length 179.1
  L1 w6.17: U1.26 958.89,348 974,348 1009,313 v5(1027,313) ; v5(1027,370) v5(1027,370) U2.3
  L4 w6.17: v5(1027,313) v5(1027,370)
SWCLK: P1.4 U1.24 | length 502.4
  L1 w6.17: P1.4 740,45 750,35 915,35 935,55 U1.24
SWDIO: P1.2 U1.23 | length 278.4
  L1 w6.17: P1.2 895,90 915.32,110.32 U1.23
VBUS: C1.1 FB1.1 J1.A4B9 J1.B4A9 | length 389
  L1 w10: J1.B4A9 288.72,280.44 264.56,280.44 215,330 215,410 264.6,459.6 288.67,459.6 293.88,464.82 354.72,464.82 C1.1 FB1.1
pads on no net: J1.A8 J1.B8 J1.MH J1.SH P1.6 P1.7 P1.8 U1.2 U1.3 U1.6 U1.7 U1.10 U1.11 U1.12 U1.13 U1.14 U1.15 U1.18 U1.19 U1.20

## Polygon pours and split planes (outlines as drawn)
GND on L1 "GND_L01_P024" (solid, remove dead copper, pour order 24): 0,694.15 cw(c45.85,694.15) 45.85,740 48.99,740 1300.38,740 1301.47,0 45.85,0 cw(c45.85,45.85) 0,45.85 0,48.99
3V3 on L1 "3V3_L01_P023" (solid, pour order 23): 1086.27,675.69 1141.88,622.16 1152,641 1152,676.54
5V0 on L1 "5V0_L01_P001" (solid, pour order 1): 474,680 525,629 525,573.99 504.01,553 495.73,553 462.73,586 422,586 421,549 421,539 411,529 386,529 386,584 368,602 368,680
VBUS on L1 "VBUS_L01_P000" (solid, pour order 0): 295,476 384,476 401,493 418,493 427,484 427,453 295,453
3V3 on L1 "3V3_L01_P020" (solid, pour order 20): 521,533 565,533 594,562 683,562 697,548 697,445 687,435 572,435 521,486
GND on L2 "GND_L02_P016" (solid, pour order 16): 0,694.15 cw(c45.85,694.15) 45.85,740 1769.18,740 cw(c1769.18,694.19) 1815,694.19 1815,45.82 cw(c1769.15,45.81) 1769.15,-0.04 1313.34,0 1313.34,290 945.07,290 944.93,0 45.85,0 44.16,0 cw(c46.57,45.38) 12.78,15 cw(c41.7,45.27) -0.16,44.31
GND on L2 "GND_L02_P017" (solid, pour order 17): 965,9.98 965,270 1290,270 1291.14,11.5
GND on L3 "GND_L03_P019" (solid, pour order 19): 0,694.15 cw(c45.85,694.15) 45.85,740 48.99,740 1300.38,740 1300.38,290 945,290 945,0.03 55.54,1.03 cw(c45.85,45.85) 0,45.85 0,48.99
3V3 on L4 "3V3_L04_P018" (solid, pour order 18): 0,694.15 cw(c45.85,694.15) 45.85,740 48.99,740 1300.38,740 1300.38,290 1159.18,290 1132.38,229 1108.98,229 1076.64,290 945,290 945,0 45.85,0 cw(c45.85,45.85) 0,45.85 0,48.99

## Keep-outs
Keep-Out Layer:
  lines w7.87: 0,48.99 ccw(c47.42,47.42) 45.85,0 ; 0,694.15 cw(c47.42,692.58) 48.99,740 ; 1766.08,-0.04 ccw(c1767.64,47.38) 1815.06,45.82 ; 1769.18,740 cw(c1767.62,692.58) 1815.04,691.01
  lines w8: 0,48.99 0,694.15 ; 45.85,0 1769.18,0 ; 48.99,740 1769.18,740 ; 1815,45.82 1815,691.01

## Silkscreen, mask and mechanical layers (free items; w line width, h text height)
Top Overlay:
  drawing of 93 lines, arcs and shapes, not listed
  text "TX" at 730,664 h25
  text "RX" at 792,664 h25
  text "+" at 698,551.34 h40
  text "+" at 845,551.34 h40
Bottom Overlay:
  drawing of 85 lines, arcs and shapes, not listed

## Dimensions
-28.01,740 to -31.15,1 on Mechanical 1
1.57,760.02 to 1816.6,760.01 on Mechanical 1